# Altium PCB eqVcVersion2.PcbDoc
Units mm, origin at the board's own origin, x right, y up, seen from the top; angles counter-clockwise.
Board outline 133.48 x 108.46 mm, 2 copper layers (Top Layer, Bottom Layer); 119 components, 83 nets, 321 pads, 6 vias.
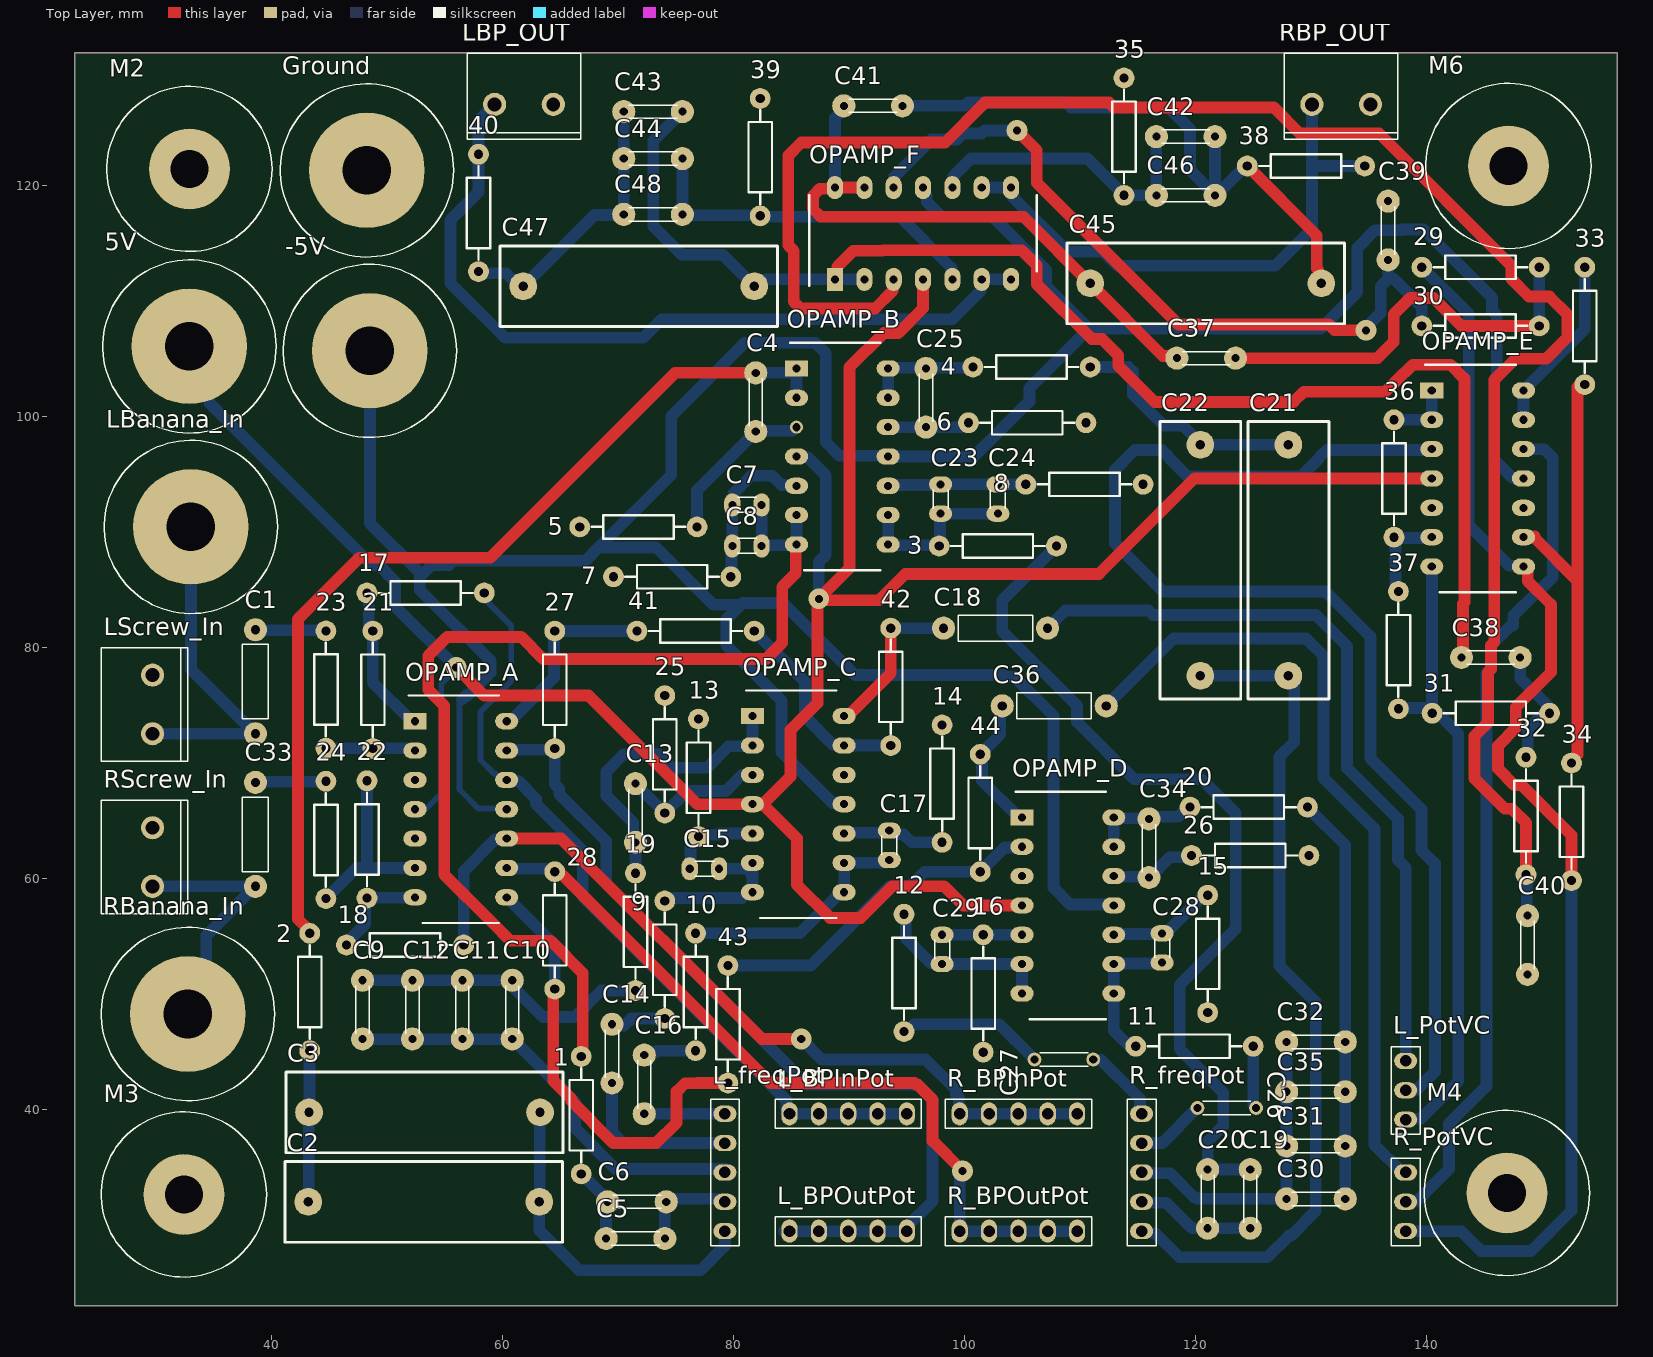
[diagram p0: Top Layer view]
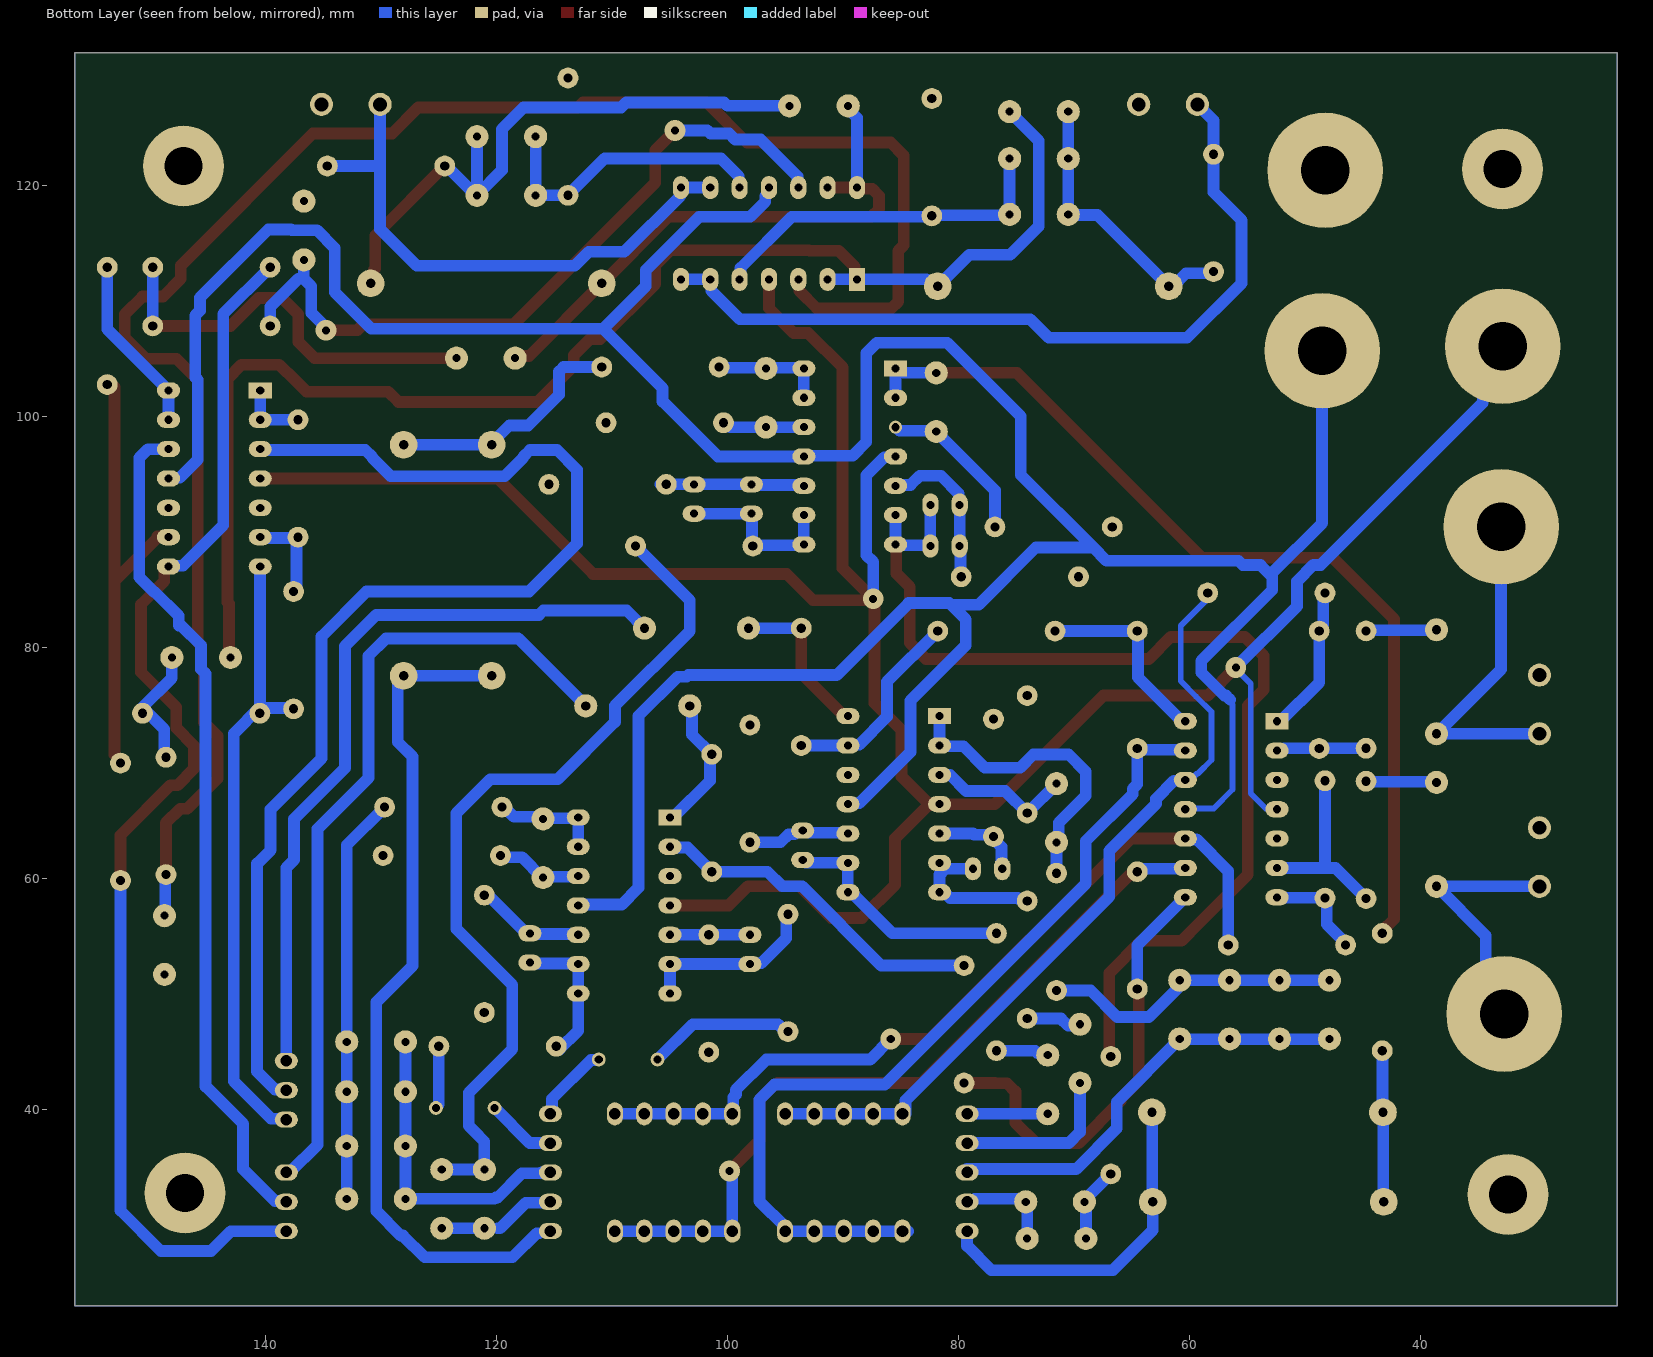
[diagram p1: Bottom Layer view, seen from below]

## Layer stack, top to bottom
Top Solder: solder mask 0.0102, Solder Resist, Dk 3.5
Top Layer: signal copper 0.0356
Dielectric 1: dielectric 0.32, FR-4, Dk 4.8
Bottom Layer: signal copper 0.0356
Bottom Solder: solder mask 0.0102, Solder Resist, Dk 3.5

## Board outline
22.987,22.987 156.464,22.987 156.464,131.445 22.987,131.445

## Design rules (kind name [scope] priority, off if disabled: settings)
Clearance [All] p1: gap=1.016 ignorepadtopadclearanceinfootprint=FALSE
PolygonConnect [All] p1: connectstyle=Relief reliefconductorwidth=0.254 reliefentries=4 polygonreliefangle="90 Angle" airgapwidth=0.254
RoutingVias [All] p1: holewidth=0.711 width=1.27 viastyle="Through Hole" minholewidth=0.711 minwidth=1.27 maxholewidth=0.711 maxwidth=1.27
SolderMaskExpansion [All] p1: expansion=0.102 istentingtop=FALSE
Width [All] p1: maxlimit=1.016 minlimit=0.508 preferedwidth=1.016 minimp=50.000000 maximp=50.000000 favimp=50.000000
30 further rules are at their usual default settings.

## Classes and differential pairs
component class voltageControl: 29 30 31 32 33 34 35 36 37 38 39 40 C37 C38 C39 C40 C41 C42 C43 C44 C45 C46 C47 C48 L_PotVC LBP_OUT OPAMP_E OPAMP_F R_PotVC RBP_OUT
component class equalizer: 1 2 3 4 5 5V 6 7 8 9 10 11 12 13 14 15 16 17 18 19 20 21 22 23 24 25 26 27 28 41 42 43 44 -5V C1 C2 C3 C4 C5 C6 C7 C8 C9 C10 C11 C12 C13 C14 C15 C16 C17 C18 C19 C20 C21 C22 C23 C24 C25 C26 C27 C28 C29 C30 C31 C32 C33 C34 C35 C36 Ground L_BPInPot L_BPOutPot L_freqPot LBanana_In LScrew_In M2 M3 M4 M6 M7 M8 OPAMP_A OPAMP_B OPAMP_C OPAMP_D R_BPInPot R_BPOutPot R_freqPot RBanana_In RScrew_In

## Components (designator, comment, footprint, x,y, rotation, side; value= is the part's Value field where it differs from the comment)
1 "Res2" "AXIAL-0.4 PCBK" 66.802,39.497 r90 top value=475
2 "Res2" "AXIAL-0.4 PCBK" 43.307,50.165 r90 top value=475
3 "Res2" "AXIAL-0.4 PCBK" 102.87,88.773 r180 top value=475
4 "Res2" "AXIAL-0.4 PCBK" 105.791,104.267 r180 top value=475
5 "Res2" "AXIAL-0.4 PCBK" 71.755,90.424 r0 top value=100k
5V "Banana Plug" "Banana Plug On top" 32.893,106.045 r0 top
6 "Res2" "AXIAL-0.4 PCBK" 105.41,99.441 r180 top value=100k
7 "Res2" "AXIAL-0.4 PCBK" 74.676,86.106 r0 top value=100k
8 "Res2" "AXIAL-0.4 PCBK" 110.363,94.107 r180 top value=100k
9 "475" "AXIAL-0.4 PCBK" 74.041,52.959 r90 top value=100
10 "Res2" "AXIAL-0.4 PCBK" 76.708,50.165 r90 top value=475
11 "Res2" "AXIAL-0.4 PCBK" 119.888,45.466 r180 top value=475
12 "Res2" "AXIAL-0.4 PCBK" 94.742,51.816 r90 top value=475
13 "Res2" "AXIAL-0.4 PCBK" 76.962,68.707 r270 top value=100k
14 "Res2" "AXIAL-0.4 PCBK" 98.044,68.199 r270 top value=100k
15 "Res2" "AXIAL-0.4 PCBK" 121.031,53.467 r90 top value=100k
16 "Res2" "AXIAL-0.4 PCBK" 101.6,50.038 r90 top value=100k
17 "Res2" "AXIAL-0.4 PCBK" 53.34,84.709 r0 top value=100
18 "Res2" "AXIAL-0.4 PCBK" 51.562,54.229 r0 top value=3.32k
19 "Res2" "AXIAL-0.4 PCBK" 71.501,55.372 r90 top value=475
20 "Res2" "AXIAL-0.4 PCBK" 124.587,66.167 r180 top value=475
21 "Res2" "AXIAL-0.4 PCBK" 48.768,76.327 r90 top value=100k
22 "Res2" "AXIAL-0.4 PCBK" 48.26,63.373 r270 top value=100k
23 "Res2" "AXIAL-0.4 PCBK" 44.704,76.342 r270 top value=100k
24 "Res2" "AXIAL-0.4 PCBK" 44.704,63.329 r270 top value=100k
25 "Res2" "AXIAL-0.4 PCBK" 74.041,70.739 r270 top value=100k
26 "Res2" "AXIAL-0.4 PCBK" 124.714,61.976 r180 top value=100k
27 "Res2" "AXIAL-0.4 PCBK" 64.516,76.327 r90 top value=3.32k
28 "Res2" "AXIAL-0.4 PCBK" 64.516,55.499 r270 top value=3.32k
29 "Res2" "AXIAL-0.4 PCBK" 144.653,112.903 r0 top value=3.92k
30 "Res2" "AXIAL-0.4 PCBK" 144.653,107.823 r180 top value=7.32k
31 "Res2" "AXIAL-0.4 PCBK" 145.542,74.295 r0 top value=3.92k
32 "Res2" "AXIAL-0.4 PCBK" 148.59,65.405 r270 top value=7.32k
33 "Res2" "AXIAL-0.4 PCBK" 153.67,107.823 r270 top value=1k
34 "Res2" "AXIAL-0.4 PCBK" 152.527,64.897 r270 top value=649
35 "Res2" "AXIAL-0.4 PCBK" 113.792,124.206 r270 top value=7.87k
36 "Res2" "AXIAL-0.4 PCBK" 137.16,94.615 r270 top value=1k
37 "Res2" "AXIAL-0.4 PCBK" 137.541,79.756 r270 top value=649
38 "Res2" "AXIAL-0.4 PCBK" 129.54,121.666 r0 top value=3.92k
39 "Res2" "AXIAL-0.4 PCBK" 82.296,122.428 r270 top value=7.87k
40 "Res2" "AXIAL-0.4 PCBK" 57.912,117.602 r90 top value=3.92k
41 "Res2" "AXIAL-0.4 PCBK" 76.708,81.407 r0 top value=200
42 "Res2" "AXIAL-0.4 PCBK" 93.599,76.581 r90 top value=100
43 "Res2" "AXIAL-0.4 PCBK" 79.502,47.371 r90 top value=200
44 "Res2" "AXIAL-0.4 PCBK" 101.346,65.659 r90 top value=100
-5V "Banana Plug" "Banana Plug On top" 48.514,105.664 r0 top
C1 "Cap" "RES THT 9mm" 38.608,81.522 r270 top
C2 "Cap" "Cap 20mm" 63.18,32.004 r180 top
C3 "Cap" "Cap 20mm" 63.246,39.751 r180 top
C4 "Cap" Cap-1#1 81.915,98.679 r90 top
C5 "Cap" Cap-1#1 68.961,28.829 r0 top
C6 "Cap" Cap-1#1 69.088,32.004 r0 top
C7 "Cap" Cap-0 79.883,92.329 r0 top
C8 "Cap" Cap-0 79.883,88.773 r0 top
C9 "Cap" Cap-1#1 47.879,46.101 r90 top
C10 "Cap" Cap-1#1 60.833,46.101 r90 top
C11 "Cap" Cap-1#1 56.515,46.101 r90 top
C12 "Cap" Cap-1#1 52.197,46.101 r90 top
C13 "Cap" Cap-1#1 71.501,68.199 r270 top
C14 "Cap" Cap-1#1 69.469,42.291 r90 top
C15 "Cap" Cap-0 76.2,60.833 r0 top
C16 "Cap" Cap-1#1 72.263,39.624 r90 top
C17 "Cap" Cap-0 93.472,64.135 r270 top
C18 "Cap" "RES THT 9mm" 107.171,81.661 r180 top
C19 "Cap" Cap-1#1 124.714,34.798 r270 top
C20 "Cap" Cap-1#1 121.031,34.798 r270 top
C21 "Cap" "Cap 20mm" 128.016,77.536 r90 top
C22 "Cap" "Cap 20mm" 120.396,77.536 r90 top
C23 "Cap" Cap-0 97.917,94.107 r270 top
C24 "Cap" Cap-0 102.87,94.107 r270 top
C25 "Cap" Cap-1#1 96.647,99.06 r90 top
C26 "Cap" Cap-1#2 120.142,40.132 r0 top
C27 "Cap" Cap-1#2 111.125,44.323 r180 top
C28 "Cap" Cap-0 117.094,55.245 r270 top
C29 "Cap" Cap-0 98.044,55.118 r270 top
C30 "Cap" Cap-1#1 127.864,32.258 r0 top
C31 "Cap" Cap-1#1 127.864,36.83 r0 top
C32 "Cap" Cap-1#1 127.864,45.847 r0 top
C33 "Cap" "RES THT 9mm" 38.608,68.309 r270 top
C34 "Cap" Cap-1#1 115.951,60.071 r90 top
C35 "Cap" Cap-1#1 127.864,41.529 r0 top
C36 "Cap" "RES THT 9mm" 112.251,74.93 r180 top
C37 "Cap" Cap-1#1 123.444,105.029 r180 top
C38 "Cap" Cap-1#1 148.082,79.121 r180 top
C39 "Cap" Cap-1#1 136.652,118.618 r270 top
C40 "Cap" Cap-1#1 148.717,51.689 r90 top
C41 "Cap" Cap-1#1 89.535,126.873 r0 top
C42 "Cap" Cap-1#1 121.666,124.206 r180 top
C43 "Cap" Cap-1#1 75.565,126.365 r180 top
C44 "Cap" Cap-1#1 70.485,122.301 r0 top
C45 "Cap" "Cap 20mm" 110.871,111.506 r0 top
C46 "Cap" Cap-1#1 121.666,119.126 r180 top
C47 "Cap" "Cap 20mm" 81.788,111.252 r180 top
C48 "Cap" Cap-1#1 70.485,117.475 r0 top
Ground "Banana Plug" "Banana Plug On top" 48.26,121.285 r0 top
L_BPInPot "Header 1x5" "Header 1x5" 94.996,39.624 r180 top
L_BPOutPot "Header 1x5" "Header 1x5" 94.996,29.464 r180 top
L_freqPot "Header 1x5" "Header 1x5" 79.248,29.464 r90 top
L_PotVC "Header 1x3" "Header 1x3" 138.176,44.196 r270 top
LBanana_In "Banana Plug" "Banana Plug On top" 33.02,90.424 r0 top
LBP_OUT "Screw 2" Screw-2 59.314,127 r0 top
LScrew_In "Screw 2" Screw-2 29.703,72.522 r90 top
M2 "Screw Hole" "M8 HOLE" 32.893,121.412 r0 top
M3 "Screw Hole" "M8 HOLE" 32.416,32.639 r0 top
M4 "Screw Hole" "M8 HOLE" 146.939,32.766 r0 top
M6 "Screw Hole" "M8 HOLE" 147.066,121.666 r0 top
OPAMP_A "TLC274CNE4" DIP794W53P254L1930H508Q14N#1 56.388,65.982 r0 top
OPAMP_B "TLC274CNE4" DIP794W53P254L1930H508Q14N#2 89.408,96.52 r0 top
OPAMP_C "TLC274CNE4" DIP794W53P254L1930H508Q14N#1 85.598,66.421 r0 top
OPAMP_D "TLC274CNE4" DIP794W53P254L1930H508Q14N#1 108.933,57.658 r0 top
OPAMP_E "TLC274CNE4" DIP794W53P254L1930H508Q14N#1 144.399,94.615 r0 top
OPAMP_F "TLC274CNE4" DIP794W53P254L1930H508Q14N#1 96.393,115.824 r90 top
R_BPInPot "Header 1x5" "Header 1x5" 109.728,39.624 r180 top
R_BPOutPot "Header 1x5" "Header 1x5" 109.728,29.464 r180 top
R_freqPot "Header 1x5" "Header 1x5" 115.316,29.464 r90 top
R_PotVC "Header 1x3" "Header 1x3" 138.176,34.544 r270 top
RBanana_In "Banana Plug" "Banana Plug On top" 32.766,48.26 r0 top
RBP_OUT "Screw 2" Screw-2 130.053,127 r0 top
RScrew_In "Screw 2" Screw-2 29.703,59.309 r90 top

## Footprints (in the part's own frame and the unit in brackets; to place one, negate y for a bottom-side part, rotate by r counter-clockwise, add the part's x,y. Pads: shape width x height; smd on the part's side, far side on the other; paste and mask are expansions set on the pad)
"AXIAL-0.4 PCBK" [mm]
  round 1.8 hole 0.8: 1(-5.08,0) 2(5.08,0)
  silkscreen extent -4.06,-1.02 4.06,1.02
"Banana Plug On top" [mm] "Banana Plug"
  round 10 hole 4.2: 1(0,0)
  silkscreen extent -7.5,-7.5 7.5,7.5
"Cap 20mm" [mm] "Capacitor with 20mm hole distance (center)"
  round 2.4 hole 0.8: 1(0,0) 2(20,0)
  silkscreen extent -2,-3.5 22,3.5
Cap-0 [mm] "Capacitor with no space"
  oval 1.4x2 hole 0.7: 1(0,0) 2(2.54,0)
  silkscreen extent 0.45,-0.65 2.1,0.65
Cap-1#1 [mm] "Capacitor with 1 space"
  round 2 hole 0.7: 1(0,0) 2(5.08,0)
  silkscreen extent 0.45,-0.58 4.62,0.58
Cap-1#2 [mm] "Capacitor with 1 space"
  round 1.2 hole 0.7: 1(0,0) 2(5.08,0)
  silkscreen extent 0.45,-0.58 4.62,0.58
DIP794W53P254L1930H508Q14N#1 [mm]
  rect 2x1.4 hole 0.7: 1(-3.97,7.62)
  oval 2x1.4 hole 0.7: 2(-3.97,5.08) 3(-3.97,2.54) 4(-3.97,0) 5(-3.97,-2.54) 6(-3.97,-5.08) 7(-3.97,-7.62) 8(3.97,-7.62) 9(3.97,-5.08) 10(3.97,-2.54) 11(3.97,0) 12(3.97,2.54) 13(3.97,5.08) 14(3.97,7.62)
  silkscreen extent -4.53,-9.84 3.3,9.84
DIP794W53P254L1930H508Q14N#2 [mm]
  rect 2x1.4 hole 0.7: 1(-3.97,7.62)
  oval 2x1.4 hole 0.7: 2(-3.97,5.08) 4(-3.97,0) 5(-3.97,-2.54) 6(-3.97,-5.08) 7(-3.97,-7.62) 8(3.97,-7.62) 9(3.97,-5.08) 10(3.97,-2.54) 11(3.97,0) 12(3.97,2.54) 13(3.97,5.08) 14(3.97,7.62)
  round 1.13 hole 0.73: 3(-3.97,2.54)
  silkscreen extent -4.53,-9.84 3.3,9.84
"Header 1x3" [mm]
  oval 1.4x2 hole 1: 1(0,0) 2(2.54,0) 3(5.08,0)
  silkscreen extent -1.25,-1.25 6.33,1.25, body extent -1.26,-1.28 6.36,1.26, height 8.89
"Header 1x5" [mm]
  oval 1.4x2 hole 1: 1(0,0) 2(2.54,0) 3(5.08,0) 4(7.62,0) 5(10.16,0)
  silkscreen extent -1.25,-1.25 11.41,1.25, body extent -1.27,-1.27 11.43,1.27, height 8.89
"M8 HOLE" [mm]
  round 7 hole 3.3: 1(0,0)
  silkscreen extent -7.15,-7.15 7.15,7.15
"RES THT 9mm" [mm]
  round 2 hole 0.8: 1(0,0) 2(9,0)
  silkscreen extent 1.28,-1.12 7.73,1.12, body extent -0.32,-1.13 9.28,1.14, height 2.36
Screw-2 [mm] "Screw Terminal with 2 connections"
  round 2 hole 1.2: 1(0,0) 2(5.075,0)
  silkscreen extent -2.37,-3.03 7.45,4.43, body extent -3.07,-3.1 7.53,4.5, height 10

## Part data
1 2 3 4 5 6 7 8 9 10 11 12 13 14 15 16 17 18 19 20 21 22 23 24 25 26 27 28 29 30 31 32 33 34 35 36 37 38 39 40 41 42 43 44: library part "Res PCBK", "Resistor", LatestRevisionDate=17-Jul-2002, LatestRevisionNote="Re-released for DXP Platform.", PackageReference=AXIAL-0.4, Published=8-Jun-2000, Publisher="Altium Limited"
C1 C18 C33 C36: library part "Capacitor Polarised", Capacity=10uF
C2 C3 C21 C22: library part "Capacitor big ceramic", Capacity=3.3uF
C4 C16 C25 C27: library part "Capacitor 1 space", Capacity=22nF
C5 C19 C42 C44: library part "Capacitor 1 space", Capacity=1uF
C6 C20: library part "Capacitor 1 space", Capacity=680nF
C7 C23: library part "Capacitor 0 space", Capacity=4.7nF
C8 C24: library part "Capacitor 0 space", Capacity=1nF
C9 C10 C11 C12 C14 C26 C30 C31 C32 C35: library part "Capacitor 1 space", Capacity=100nF
C13 C34: library part "Capacitor 1 space", Capacity=1.2nF
C15 C28: library part "Capacitor 0 space", Capacity=390pF
C17 C29: library part "Capacitor 0 space", Capacity=85pF
C37 C38: library part "Capacitor 1 space", Capacity=2.2nF
C39 C40: library part "Capacitor 1 space", Capacity=1nF
C41 C43: library part "Capacitor 1 space", Capacity=1.5uF
C45 C47: library part "Capacitor big ceramic", Capacity=330nF
C46 C48: library part "Capacitor 1 space", Capacity=220nF
OPAMP_A OPAMP_B OPAMP_C OPAMP_D OPAMP_E OPAMP_F: "Precision Amplifiers Quad Single Supply Op Amp", Manufacturer_Name="Texas Instruments", Mouser Part Number=595-TLC274CNE4, Datasheet Link=https://www.ti.com/lit/ds/symlink/tlc274.pdf?ts=1639464334605&ref_url=https%253A%252F%252Fwww.ti.com%252Fstore%252Fti%252Fen%252Fp%252Fproduct%252F%253Fp%253DTLC274CN, Geometry.Height=5.08mm, Manufacturer_Part_Number=TLC274CNE4, Mouser Price/Stock=https://www.mouser.co.uk/ProductDetail/Texas-Instruments/TLC274CNE4?qs=Mkt%2FZhxPIiTvMsNXR1cCkw%3D%3D

## Via types
v1: diameter 1.8, hole 0.7, Top Layer to Bottom Layer, 6 vias

## Nets (pads, with @x,y where several pads share a name; then routed paths per layer and width w, separated by ;. In a path a pad name is that pad's centre, name@x,y a point inside that pad or via, vN(x,y) a via of type N, cw(c..) or ccw(c..) an arc to the next point about the centre after c; other vN are vias at no path point)
5V: 5V.1 OPAMP_A.4 OPAMP_B.4 OPAMP_C.4 OPAMP_D.4 OPAMP_E.4 OPAMP_F.4 | length 237.7
  Top Layer w1.016: v1(55.983,78.256) 58.413,75.826 67.443,75.826 76.848,66.421 OPAMP_C.4 81.701,66.348 82.607,66.348 85.477,63.477 85.477,59.447 88.347,56.577 90.995,56.577 93.738,59.32 98.215,59.32 99.877,57.658 OPAMP_D.4 ; OPAMP_C.4@82.607,66.494 84.915,68.803 84.915,72.833 87.249,75.167 v1@87.249,84.074 ; OPAMP_B.4 OPAMP_B.4@85.511,96.447 ; OPAMP_F.4 96.393,109.347 94.25,107.204 92.997,107.204 90.02,104.227 90.02,86.845 v1@87.249,84.074 ; OPAMP_E.4 119.887,94.615 111.621,86.349 94.859,86.349 92.584,84.074 v1@87.249,84.074
  Bottom Layer w0.508: OPAMP_A.4@52.491,66.055 53.397,66.055 54.688,67.347 54.688,76.841 55.983,78.137 v1(55.983,78.256)
  Bottom Layer w1.016: 5V.1 34.612,104.326 34.612,101.151 48.63,87.133 49.264,87.133 50.684,85.713 50.684,83.555 v1(55.983,78.256) ; OPAMP_A.4 OPAMP_A.4@52.491,66.055 ; OPAMP_B.4 85.511,96.447 86.417,96.447 87.962,94.901 87.962,87.979 87.373,87.39 v1(87.373,84.198)
-5V: -5V.1 OPAMP_A.11 OPAMP_B.11 OPAMP_C.11 OPAMP_D.11 OPAMP_E.11 OPAMP_F.11 | length 301.8
  Bottom Layer w0.508: 56.466,75.262 56.261,75.057 56.261,67.691 57.897,66.055 OPAMP_A.11@60.285,66.055
  Bottom Layer w1.016: -5V.1@48.514,106.045 48.514,90.757 52.832,86.439 52.832,85.979 52.832,84.963 58.976,78.819 58.976,77.821 56.987,75.832 56.831,75.832 56.466,75.467 ; 52.832,86.106 53.853,87.127 55.377,87.127 55.753,87.503 65.659,87.503 67.182,87.503 68.325,88.646 ; OPAMP_A.11@60.285,66.055 OPAMP_A.11 ; OPAMP_C.11 89.495,66.494 88.589,66.494 84.152,70.932 84.152,75.372 79.364,80.16 79.364,82.411 80.589,83.636 80.635,83.682 ; OPAMP_F.11 96.393,119.39 96.709,119.074 96.709,118.573 98.012,117.27 102.44,117.27 107.056,112.654 107.056,111.258 110.745,107.569 ; OPAMP_D.11 112.83,57.731 109.147,57.731 107.695,59.183 107.695,74.055 104.296,77.454 103.521,77.454 103.374,77.601 90.541,77.601 84.312,83.831 80.784,83.831 80.635,83.682 ; OPAMP_E.11 148.296,94.688 147.39,94.688 146.05,96.029 145.845,96.234 145.845,103.156 146.05,103.361 146.05,108.725 145.652,109.123 145.652,110.252 139.739,116.165 137.769,116.165 137.697,116.094 135.512,116.094 133.981,114.563 133.981,110.74 130.81,107.569 110.745,107.569 ; 68.325,88.646 74.597,94.918 74.597,100.011 80.951,106.364 84.52,106.364 87.069,106.364 87.962,105.471 87.962,102.809 87.962,97.775 89.143,96.593 93.305,96.593 OPAMP_B.11 100.837,96.52 105.6,101.283 105.6,102.425 110.745,107.569 ; 68.325,88.646 73.279,88.646 78.243,83.682 80.635,83.682
GND: 5.1 6.1 7.1 8.1 13.1 14.1 15.1 16.1 25.1 26.1 35.1 39.1 C39.1 C40.1 Ground.1 LBP_OUT.2 LScrew_In.2 M2.1 M3.1 M4.1 M6.1 OPAMP_A.3 OPAMP_A.5 OPAMP_C.12 OPAMP_D.3 OPAMP_E.5 OPAMP_E.10 RBP_OUT.2 RScrew_In.2
L1BP_IN+: 32.2 C40.2 OPAMP_F.3 | length 160.1
  Top Layer w1.016: OPAMP_F.3 93.78,111.781 93.78,110.875 92.234,109.33 85.803,109.33 85.208,109.925 85.208,114.312 84.72,114.8 84.72,122.566 85.852,123.698 98.298,123.698 101.766,127.166 112.484,127.166 112.92,126.73 126.754,126.73 129.008,124.476 135.874,124.476 147.309,113.041 147.309,111.899 148.845,110.363 150.621,110.363 152.157,108.827 152.157,106.819 150.326,104.988 147.676,104.988 145.845,103.156 145.845,80.453 145.558,80.166 145.558,78.108 145.288,77.838 145.288,73.485 144.134,72.331 144.134,68.639 146.744,66.029 147.362,66.029 148.59,64.801 32.2
  Bottom Layer w1.016: 32.2 148.653,60.261 148.653,56.832 C40.2
L1BP_OUT: C38.2 C43.1 C47.1 OPAMP_F.1 OPAMP_F.2 | length 120.9
  Top Layer w1.016: OPAMP_F.1 88.965,112.046 88.965,112.951 90.342,114.328 92.882,114.328 92.932,114.378 104.934,114.378 106.237,113.075 106.237,111.441 110.987,106.691 111.875,106.691 113.295,105.271 113.295,104.383 116.443,101.235 128.458,101.235 129.342,102.119 136.422,102.119 138.062,103.759 138.098,103.759 138.798,104.459 142.06,104.459 143.256,103.263 143.256,83.901 143.129,83.774 C38.2@143.129,78.994 ; OPAMP_F.2 OPAMP_F.2@91.386,111.927
  Bottom Layer w1.016: C43.1 73.041,123.841 73.041,116.43 75.497,113.973 79.067,113.973 C47.1 82.163,111.252 82.765,111.854 OPAMP_F.1 OPAMP_F.2
L1kHz: 19.2 C13.2 OPAMP_C.1 OPAMP_C.2 | length 27
  Bottom Layer w1.016: 19.2@71.438,60.515 19.2 C13.2 71.313,63.307 71.313,64.818 68.977,67.154 68.977,69.244 70.456,70.723 73.515,70.723 74.653,69.585 77.712,69.585 79.555,71.428 81.555,71.428 OPAMP_C.2 OPAMP_C.1
L1kHz+: 25.2 C13.1 OPAMP_C.3 | length 12.5
  Bottom Layer w1.016: C13.1 25.2 75.935,67.553 79.315,67.553 80.723,68.961 OPAMP_C.3
L1VOl_IN+: L_PotVC.2 OPAMP_E.3 | length 105.1
  Bottom Layer w1.016: L_PotVC.2 138.249,41.729 139.155,41.729 140.7,43.275 140.7,61.279 139.532,62.448 139.532,65.987 135.117,70.401 135.117,75.68 135.128,75.691 135.128,80.931 131.223,84.836 117.143,84.836 113.019,88.96 113.019,95.366 114.735,97.082 117.077,97.082 117.672,96.486 117.672,96.408 119.268,94.812 129.144,94.812 130.74,96.408 130.74,96.486 131.335,97.082 140.356,97.082 OPAMP_E.3
L1VOL_OUT: 36.1 OPAMP_E.1 OPAMP_E.2 | length 5.8
  Bottom Layer w1.016: 36.1 OPAMP_E.2 OPAMP_E.1
L2BP_IN+: 39.2 C44.2 C48.2 OPAMP_F.5 | length 31.1
  Bottom Layer w1.016: C44.2 C48.2 75.629,117.411 82.233,117.411 39.2 82.374,117.27 94.422,117.27 98.86,112.833 98.86,111.927 OPAMP_F.5
L2BP_OUT: 40.2 LBP_OUT.1 OPAMP_F.6 OPAMP_F.7 | length 70.2
  Bottom Layer w1.016: LBP_OUT.1 57.912,125.598 57.912,119.38 55.488,116.956 55.488,111.517 60.209,106.796 72.172,106.796 73.772,108.396 98.92,108.396 101.4,110.875 101.4,111.781 OPAMP_F.6 OPAMP_F.7
L2VOL_IN-: 36.2 37.1 OPAMP_E.6 | length 8.1
  Bottom Layer w1.016: 37.1 137.541,85.048 137.294,85.295 137.294,89.335 137.167,89.462 140.356,89.462 OPAMP_E.6
L2VOL_OUT: 31.1 37.2 L_PotVC.3 OPAMP_E.7 | length 54.4
  Bottom Layer w1.016: 37.2 137.605,74.739 140.398,74.739 31.1@140.462,74.803 ; L_PotVC.3 138.249,39.189 139.488,39.189 142.732,42.433 142.732,72.533 31.1@140.462,74.803 ; OPAMP_E.7 140.446,86.979 140.446,74.819 31.1@140.462,74.803
L4kHz: 9.2 C15.2 OPAMP_C.6 OPAMP_C.7 | length 12.5
  Bottom Layer w1.016: 9.2 74.191,58.189 74.745,58.189 74.849,58.293 80.716,58.293 81.224,58.801 OPAMP_C.7 81.628,60.325 81.12,60.833 C15.2
L4kHz+: 13.2 C15.1 OPAMP_C.5 | length 7.9
  Bottom Layer w1.016: C15.1 76.273,60.906 76.273,62.726 76.962,63.415 13.2 77.112,63.777 78.636,63.777 78.74,63.881 OPAMP_C.5
L16kHz: 10.2 C17.2 OPAMP_C.8 OPAMP_C.9 | length 20.9
  Bottom Layer w1.016: 10.2 85.712,55.245 89.268,58.801 OPAMP_C.8 OPAMP_C.9 93.218,61.341 C17.2
L16kHz+: 14.2 C17.1 OPAMP_C.10 | length 8.6
  Bottom Layer w1.016: OPAMP_C.10 89.641,63.954 92.888,63.954 C17.1@93.068,64.135 ; C17.1 93.876,64.135 94.192,63.819 94.693,63.819 95.393,63.119 14.2@98.087,63.119
L60Hz: 2.2 C4.2 OPAMP_B.1 OPAMP_B.2 | length 82.3
  Top Layer w1.016: 2.2 43.307,55.457 42.28,56.484 42.28,82.426 47.611,87.757 58.928,87.757 74.93,103.759 C4.2
  Bottom Layer w1.016: C4.2 84.757,103.759 85.138,104.14 OPAMP_B.1 OPAMP_B.2
L60Hz+: 5.2 C4.1 OPAMP_B.3 | length 14
  Bottom Layer w1.016: 5.2 76.835,93.599 C4.1 81.98,98.744 85.091,98.744 85.407,99.06 OPAMP_B.3
L250Hz: 1.2 C7.2 C8.2 OPAMP_B.6 OPAMP_B.7 | length 93.1
  Top Layer w1.016: 1.2 66.94,44.715 66.94,51.805 64.151,54.594 60.681,54.594 59.137,56.138 54.942,60.333 54.942,74.933 53.559,76.316 53.559,79.26 55.198,80.899 61.596,80.899 63.512,78.983 82.792,78.983 84.212,80.403 84.212,82.411 84.201,82.422 84.201,85.225 85.375,86.398 OPAMP_B.7@85.375,88.837
  Bottom Layer w1.016: C7.2 C8.2 82.486,88.837 85.375,88.837 OPAMP_B.7 OPAMP_B.6
L250Hz+: 7.2 C7.1 C8.1 OPAMP_B.5 | length 14.1
  Bottom Layer w1.016: 7.2@79.756,85.725 79.819,85.788 79.819,88.709 C8.1 C7.1 79.956,92.402 79.956,93.308 81.502,94.853 83.344,94.853 84.144,94.053 85.365,94.053 OPAMP_B.5
L_IN+: 21.1 23.2 OPAMP_A.2 | length 7.8
  Bottom Layer w1.016: 23.2 48.768,71.262 51.814,71.262 52.014,71.062 OPAMP_A.2
L_OUT: 17.1 21.2 OPAMP_A.1 | length 12.5
  Bottom Layer w1.016: 17.1@48.26,84.201 48.41,84.051 48.41,81.977 48.768,81.619 21.2 48.768,76.952 52.118,73.602 OPAMP_A.1
L_Pot1kHz: C9.1 C10.1 C11.1 C12.1 L_freqPot.3 | length 37.4
  Bottom Layer w1.016: C9.1@47.91,46.074 60.833,46.074 C10.1@60.86,46.074 ; C10.1 C10.1@60.86,46.074 ; L_freqPot.3@79.248,34.835 69.812,34.835 66.294,38.353 66.294,40.64 C10.1@60.86,46.074
L_Pot4kHz: C14.1 L_freqPot.4 | length 14.2
  Bottom Layer w1.016: C14.1@69.469,42.046 69.469,38.052 70.437,37.084 L_freqPot.4
L_Pot16kHz: C16.1 L_freqPot.5 | length 7
  Bottom Layer w1.016: C16.1 L_freqPot.5
L_Pot60Hz: C2.1 C3.1 L_freqPot.1 | length 29.9
  Bottom Layer w1.016: C3.1 63.213,39.718 63.213,32.037 C2.1 63.18,29.53 66.622,26.088 77.155,26.088 79.248,28.181 L_freqPot.1
L_Pot250Hz: C5.2 C6.2 L_freqPot.2 | length 8.3
  Bottom Layer w1.016: C5.2@74.041,29.319 74.041,32.258 78.59,32.258 78.844,32.004 L_freqPot.2
LBP_IN: 17.2 L_BPInPot.1 L_BPInPot.2 L_BPInPot.3 L_BPInPot.4 L_BPInPot.5 OPAMP_A.12 | length 69.1
  Bottom Layer w0.508: 17.2 58.42,84.201 60.754,81.867 60.754,77.084 59.421,75.751 58.088,74.418 58.088,70.246 59.242,69.092 59.314,69.092 59.884,68.522 OPAMP_A.12
  Bottom Layer w1.016: OPAMP_A.12 60.431,68.449 61.337,68.449 62.882,66.903 62.882,66.451 66.94,62.393 66.94,58.409 84.582,40.767 84.582,39.624 87.122,39.624 89.662,39.624 92.202,39.624 L_BPInPot.1@94.742,39.624
LBP_OUT: 27.1 L_BPOutPot.1 L_BPOutPot.2 L_BPOutPot.3 L_BPOutPot.4 L_BPOutPot.5 OPAMP_A.13 | length 75.9
  Bottom Layer w1.016: OPAMP_A.13 60.431,71.135 64.404,71.135 27.1 64.516,68.143 64.914,67.745 64.914,67.293 68.972,63.235 68.972,59.552 86.376,42.148 95.917,42.148 97.22,40.845 97.22,32.069 L_BPOutPot.1@94.988,29.837 ; L_BPOutPot.5@84.328,29.464 86.868,29.464 89.408,29.464 91.948,29.464 L_BPOutPot.1@94.488,29.464
LEndEq-: 41.2 42.1 OPAMP_C.13 | length 17.7
  Bottom Layer w1.016: 41.2 86.184,77.011 86.184,73.98 88.589,71.574 89.495,71.574 OPAMP_C.13 42.1
LEndEqOut: 42.2 C18.2 OPAMP_C.14 | length 14
  Top Layer w1.016: OPAMP_C.14 89.868,74.041 93.599,77.772 42.2
  Bottom Layer w1.016: 42.2 C18.2
LEQ_TO_VC: C18.1 L_PotVC.1 | length 65.8
  Bottom Layer w1.016: C18.1 108.695,83.185 115.921,83.185 116.302,82.804 130.382,82.804 133.096,80.09 133.096,76.533 133.085,76.522 133.085,69.56 137.5,65.145 137.5,61.606 138.176,60.93 L_PotVC.1
LOPAMP_OUT: 27.2 41.1 OPAMP_A.14 | length 16.8
  Bottom Layer w1.016: OPAMP_A.14 60.658,73.602 64.458,77.402 64.458,81.349 27.2 41.1
Net1_1: 1.1 C5.1 C6.1 | length 6.1
  Bottom Layer w1.016: 1.1@67.014,34.417 1.1 68.961,32.258 C5.1@68.961,29.417
Net2_1: 2.1 C2.2 C3.2 | length 13.1
  Bottom Layer w1.016: C2.2 43.213,32.037 43.213,39.718 C3.2 43.276,39.782 43.276,45.054 2.1
Net3_1: 3.1 C19.1 C20.1 | length 75.5
  Bottom Layer w1.016: 3.1 103.251,84.074 103.251,81.407 109.727,74.931 109.727,73.534 114.67,68.591 120.511,68.591 123.455,65.647 123.455,55.621 118.607,50.773 118.607,45.223 122.391,41.439 122.391,38.583 121.918,38.11 121.031,37.223 C20.1 C19.1
Net4_1: 4.1 C21.2 C22.2 | length 21.6
  Bottom Layer w1.016: 4.1 114.173,104.267 114.57,103.87 114.57,101.872 117.239,99.203 118.862,99.203 120.529,97.536 C21.2@128.524,97.536
Net9_1: 9.1 C14.2 | length 4.1
  Bottom Layer w1.016: C14.2@70.231,47.244 70.497,47.244 71.121,47.868 74.03,47.868 9.1
Net10_1: 10.1 C16.2 | length 4.6
  Bottom Layer w1.016: C16.2 72.451,44.892 73.147,44.892 73.34,45.085 10.1
Net11_1: 11.1 C26.2 | length 5.6
  Bottom Layer w1.016: 11.1@124.968,45.676 124.968,40.436 125.187,40.217 C26.2@125.14,40.17
Net12_1: 12.1 C27.2 | length 12.8
  Bottom Layer w1.016: 12.1 94.954,46.736 95.6,47.382 102.986,47.382 C27.2
Net19_1: 19.1 C9.2 C10.2 C11.2 C12.2 | length 25.4
  Bottom Layer w1.016: C9.2 C12.2 C11.2 C10.2 ; C10.2@61.021,50.486 63.512,47.995 66.252,47.995 68.549,50.292 19.1
Net20_1: 20.1 C30.2 C31.2 C32.2 C35.2 | length 35.3
  Bottom Layer w1.016: 20.1 132.944,62.89 C35.2 C31.2 C30.2
Net23_1: 23.1 C1.1 | length 6.1
  Bottom Layer w1.016: C1.1 38.658,81.472 44.654,81.472 23.1
Net24_1: 24.1 C33.1 | length 6.1
  Bottom Layer w1.016: C33.1 38.658,68.359 44.654,68.359 24.1
Net29_2: 29.2 30.1 C37.1 | length 35.9
  Top Layer w1.016: C37.1 123.455,105.018 135.729,105.018 137.149,106.438 137.149,108.827 138.569,110.247 140.577,110.247 143.001,107.823 30.1
  Bottom Layer w1.016: 30.1 149.733,112.649 29.2@149.86,112.776
Net31_2: 31.2 32.1 C38.1 | length 10.5
  Bottom Layer w1.016: C38.1@147.955,79.529 C38.1@147.962,79.523 ; C38.1 148.089,79.114 148.089,77.336 150.622,74.803 148.728,72.909 148.728,70.623 32.1
Net38_1: 38.1 C41.2 C42.1 C45.2 C46.1 | length 54.6
  Top Layer w1.016: 38.1 130.479,115.647 130.479,112.793 130.606,112.666 130.606,111.771 C45.2 C45.2@131.031,111.346
  Bottom Layer w1.016: C41.2 99.993,126.873 100.286,127.166 108.741,127.166 109.177,126.73 117.631,126.73 119.507,124.854 119.507,121.285 C46.1 ; C42.1 C46.1 ; 38.1 124.333,121.666 121.793,119.126 C46.1
Net40_1: 40.1 C43.2 C44.1 C47.2 C48.1 | length 24.6
  Bottom Layer w1.016: 40.1 58.062,112.372 60.294,112.372 61.413,111.252 C47.2 67.961,117.425 70.435,117.425 C48.1 C44.1 C43.2
NetC1_2: C1.2 LBanana_In.1 LScrew_In.1 | length 29.1
  Bottom Layer w1.016: LScrew_In.1 C1.2 33.02,78.11 LBanana_In.1
NetC33_2: C33.2 RBanana_In.1 RScrew_In.1 | length 22.4
  Bottom Layer w1.016: RScrew_In.1 C33.2 34.349,55.05 34.349,49.843 RBanana_In.1
R1BP_IN+: 30.2 C39.2 OPAMP_F.12 | length 64.4
  Top Layer w1.016: v1(104.521,124.742) 106.237,123.026 106.237,120.204 118.491,107.95 131.511,107.95 132.019,107.442 v1(134.725,107.442)
  Bottom Layer w1.016: OPAMP_F.12 93.926,119.867 93.926,120.773 97.106,123.952 99.312,123.952 99.837,124.477 101.462,124.477 101.727,124.742 v1(104.521,124.742) ; v1(134.725,107.442) 134.725,107.654 136.013,108.942 136.013,111.26 136.652,111.899 C39.2@136.652,113.665 ; 137.149,111.899 139.573,109.475 30.2
R1BP_OUT: C37.2 C41.1 C45.1 OPAMP_F.13 OPAMP_F.14 | length 50.3
  Top Layer w1.016: OPAMP_F.13 OPAMP_F.14 88.67,119.691 87.463,119.691 86.868,119.095 86.868,117.943 87.541,117.27 105.09,117.27 C45.1@110.967,111.393 ; C45.1 117.16,105.217 118.176,105.217 C37.2
  Bottom Layer w1.016: OPAMP_F.14 88.773,125.845 89.535,126.607 C41.1
R1kHz: 20.2 C34.2 OPAMP_D.13 OPAMP_D.14 | length 9.6
  Bottom Layer w1.016: OPAMP_D.13 OPAMP_D.14 112.966,65.215 115.887,65.215 C34.2 116.139,65.339 118.467,65.339 119.295,66.167 20.2
R1kHz+: 26.2 C34.1 OPAMP_D.12 | length 7.6
  Bottom Layer w1.016: OPAMP_D.12 112.966,60.134 115.887,60.134 C34.1 116.01,60.071 117.765,61.826 119.484,61.826 26.2
R1VOl_IN+: OPAMP_E.12 R_PotVC.2 | length 73.2
  Bottom Layer w1.016: R_PotVC.2 138.249,32.077 139.155,32.077 141.915,34.838 141.915,38.742 145.161,41.988 145.161,77.711 145.558,78.108 145.558,80.166 147.273,81.882 147.494,81.882 147.494,82.724 149.541,84.771 149.59,84.771 150.893,86.074 150.893,96.416 150.154,97.155 OPAMP_E.12
R1VOL_OUT: 33.1 OPAMP_E.13 OPAMP_E.14 | length 15.5
  Bottom Layer w1.016: OPAMP_E.13 OPAMP_E.14 148.565,102.235 148.742,102.412 148.742,102.608 153.67,107.536 33.1
R2BP_IN+: 35.2 C42.2 C46.2 OPAMP_F.10 | length 25.6
  Bottom Layer w1.016: OPAMP_F.10 99.006,119.867 99.006,120.773 100.552,122.318 110.6,122.318 35.2 C46.2 C42.2
R2BP_OUT: 38.2 OPAMP_F.8 OPAMP_F.9 RBP_OUT.1 | length 48.5
  Bottom Layer w1.016: OPAMP_F.9 OPAMP_F.8 104.086,119.721 104.086,119.053 108.909,114.23 111.999,114.23 113.199,113.03 126.892,113.03 130.053,116.191 130.053,121.666 ; RBP_OUT.1 130.053,121.666 ; 38.2 130.053,121.666
R2VOL_IN-: 33.2 34.1 OPAMP_E.9 | length 38.9
  Top Layer w1.016: OPAMP_E.9 148.442,89.608 149.348,89.608 149.348,89.462 152.944,85.865 ; 34.1 152.527,70.189 153.046,70.708 153.046,75.197 ; 153.046,75.299 33.2@153.046,102.532
R2VOL_OUT: 29.1 34.2 OPAMP_E.8 R_PotVC.3 | length 108.3
  Top Layer w1.016: OPAMP_E.8 148.565,86.995 148.742,86.818 148.742,85.713 150.749,83.706 150.749,77.851 147.701,74.803 147.701,73.024 146.166,71.489 146.166,69.481 147.586,68.061 148.204,68.061 152.527,63.738 34.2
  Bottom Layer w1.016: R_PotVC.3 142.976,29.464 144.698,27.742 149.02,27.742 152.527,31.249 34.2 ; 29.1@139.7,112.776 143.62,108.856 143.62,90.568 147.12,87.068 148.296,87.068 OPAMP_E.8
R4kHz: 11.2 C28.2 OPAMP_D.8 OPAMP_D.9 | length 12.3
  Bottom Layer w1.016: 11.2@114.533,45.191 112.903,46.821 OPAMP_D.8 OPAMP_D.9 112.966,52.642 117.03,52.642 C28.2
R4kHz+: 15.2 C28.1 OPAMP_D.10 | length 9.5
  Bottom Layer w1.016: OPAMP_D.10 112.966,55.181 117.03,55.181 C28.1 117.394,55.245 120.546,58.397 120.881,58.397 15.2
R16kHz: 12.2 C29.2 OPAMP_D.6 OPAMP_D.7 | length 15.7
  Bottom Layer w1.016: 12.2 94.892,56.746 94.892,54.825 97.065,52.651 97.971,52.651 C29.2 OPAMP_D.6 OPAMP_D.7
R16kHz+: 16.2 C29.1 OPAMP_D.5 | length 7
  Bottom Layer w1.016: C29.1@98.117,55.191 C29.1 16.2 OPAMP_D.5
R60Hz: 4.2 C25.2 OPAMP_B.13 OPAMP_B.14 | length 9.9
  Bottom Layer w1.016: OPAMP_B.13 OPAMP_B.14 93.441,104.203 100.647,104.203 4.2
R60Hz+: 6.2 C25.1 OPAMP_B.12 | length 7.1
  Bottom Layer w1.016: OPAMP_B.12 C25.1 99.737,99.06 100.118,99.441 6.2
R250Hz: 3.2 C23.2 C24.2 OPAMP_B.8 OPAMP_B.9 | length 14.8
  Bottom Layer w1.016: OPAMP_B.9 OPAMP_B.8 93.441,88.837 97.727,88.837 3.2 97.853,88.837 97.853,91.504 C23.2 C24.2
R250Hz+: 8.2 C23.1 C24.1 OPAMP_B.10 | length 12.5
  Bottom Layer w1.016: OPAMP_B.10 93.441,94.043 97.853,94.043 C23.1 C24.1 8.2@105.791,94.107
R_IN+: 22.1 24.2 OPAMP_A.6 | length 16.4
  Bottom Layer w1.016: 24.2 47.357,60.902 48.26,60.902 ; 22.1 48.26,60.902 ; OPAMP_A.6 48.26,60.902
R_OUT: 18.1 22.2 OPAMP_A.7 | length 9
  Bottom Layer w1.016: 18.1 46.482,54.401 48.11,56.029 48.11,58.143 22.2 48.295,58.328 52.384,58.328 OPAMP_A.7
R_Pot1kHz: C30.1 C31.1 C32.1 C35.1 R_freqPot.3 | length 26.2
  Bottom Layer w1.016: R_freqPot.3@116.078,34.544 116.151,34.471 117.789,34.471 119.891,32.369 120.044,32.369 120.155,32.258 C30.1 ; C30.1@127.864,32.369 C31.1 C35.1 C32.1
R_Pot4kHz: C26.1 R_freqPot.4 | length 6.1
  Bottom Layer w1.016: R_freqPot.4 117.094,37.084 C26.1 C26.1@120.167,40.157
R_Pot16kHz: C27.1 R_freqPot.5 | length 6.8
  Bottom Layer w1.016: C27.1 111.16,44.288 111.795,44.288 115.181,40.902 115.181,39.759 R_freqPot.5
R_Pot60Hz: C21.1 C22.1 R_freqPot.1 | length 72.4
  Bottom Layer w1.016: R_freqPot.1@116.27,29.287 116.499,29.287 118.591,27.194 126.189,27.194 128.078,29.083 128.258,29.083 130.388,31.213 130.388,49.295 127.243,52.439 127.243,70.522 128.524,71.803 128.524,77.536 C21.1 C22.1@120.904,77.536
R_Pot250Hz: C19.2 C20.2 R_freqPot.2 | length 9.7
  Bottom Layer w1.016: R_freqPot.2@114.867,32.004 114.94,31.931 117.455,31.931 119.668,29.718 119.893,29.718 ; C20.2 C19.2
RBP_IN: 18.2 OPAMP_A.10 R_BPInPot.1 R_BPInPot.2 R_BPInPot.3 R_BPInPot.4 R_BPInPot.5 | length 71.5
  Top Layer w1.016: OPAMP_A.10 65.081,63.442 82.422,46.101 v1(85.852,46.101)
  Bottom Layer w1.016: 18.2 56.642,60.631 59.379,63.369 60.285,63.369 OPAMP_A.10 ; v1(85.852,46.101) 87.641,44.312 96.627,44.312 99.252,41.687 99.252,41.29 99.495,41.048 99.495,39.697 R_BPInPot.5 R_BPInPot.4 R_BPInPot.3 R_BPInPot.2 R_BPInPot.1
RBP_OUT: 28.1 OPAMP_A.9 R_BPOutPot.1 R_BPOutPot.2 R_BPOutPot.3 R_BPOutPot.4 R_BPOutPot.5 | length 67.5
  Top Layer w1.016: 28.1@64.516,60.702 64.728,60.702 65.12,60.31 65.166,60.31 83.185,42.291 95.631,42.291 95.774,42.148 95.917,42.148 97.22,40.845 97.22,37.273 v1(99.822,34.671)
  Bottom Layer w1.016: OPAMP_A.9 60.431,60.829 64.389,60.829 28.1@64.516,60.702 ; v1(99.822,34.671) 99.822,34.459 99.568,34.205 R_BPOutPot.5 101.727,29.464 104.267,29.464 106.807,29.464 R_BPOutPot.1@109.347,29.464
REndEq-: 43.2 44.1 OPAMP_D.2 | length 29.7
  Bottom Layer w1.016: 43.2 86.663,52.451 93.521,59.309 93.727,59.309 93.738,59.32 95.261,59.32 96.52,60.579 44.1 103.432,62.665 104.829,62.665 OPAMP_D.2@104.902,62.738
REndEqOut: 44.2 C36.2 OPAMP_D.1 | length 12.4
  Bottom Layer w1.016: C36.2@102.985,74.93 C36.2 103.063,74.742 103.063,72.456 44.2 101.496,70.589 101.496,68.445 104.663,65.278 OPAMP_D.1
REQ_TO_VC: C36.1 R_PotVC.1 | length 69.7
  Bottom Layer w1.016: C36.1 118.093,80.772 129.54,80.772 131.064,79.248 131.064,77.374 131.053,77.363 131.053,68.718 135.468,64.303 135.468,36.952 137.876,34.544 R_PotVC.1
ROPAMP_OUT: 28.2 43.1 OPAMP_A.8 | length 38.9
  Top Layer w1.016: 28.2 64.378,50.281 64.378,42.471 65.97,40.879 65.97,40.71 69.596,37.084 72.784,37.084 72.8,37.1 73.308,37.1 75.057,38.849 75.057,41.542 75.79,42.275 76.806,42.275 76.822,42.291 43.1
  Bottom Layer w1.016: OPAMP_A.8 60.554,58.362 60.731,58.185 60.731,57.989 64.516,54.204 28.2@64.516,50.542

## Polygon pours and split planes (outlines as drawn)
GND on Top Layer "NONET_L01_P000" (solid, shelved, pour order 0): 22.987,22.987 22.987,131.445 156.464,131.445 156.464,22.987
GND on Bottom Layer "NONET_L02_P001" (solid, shelved, pour order 1): 22.987,22.987 22.987,131.445 156.464,131.445 156.464,22.987